# EAGLE board electro (EAGLE 7.2.0)
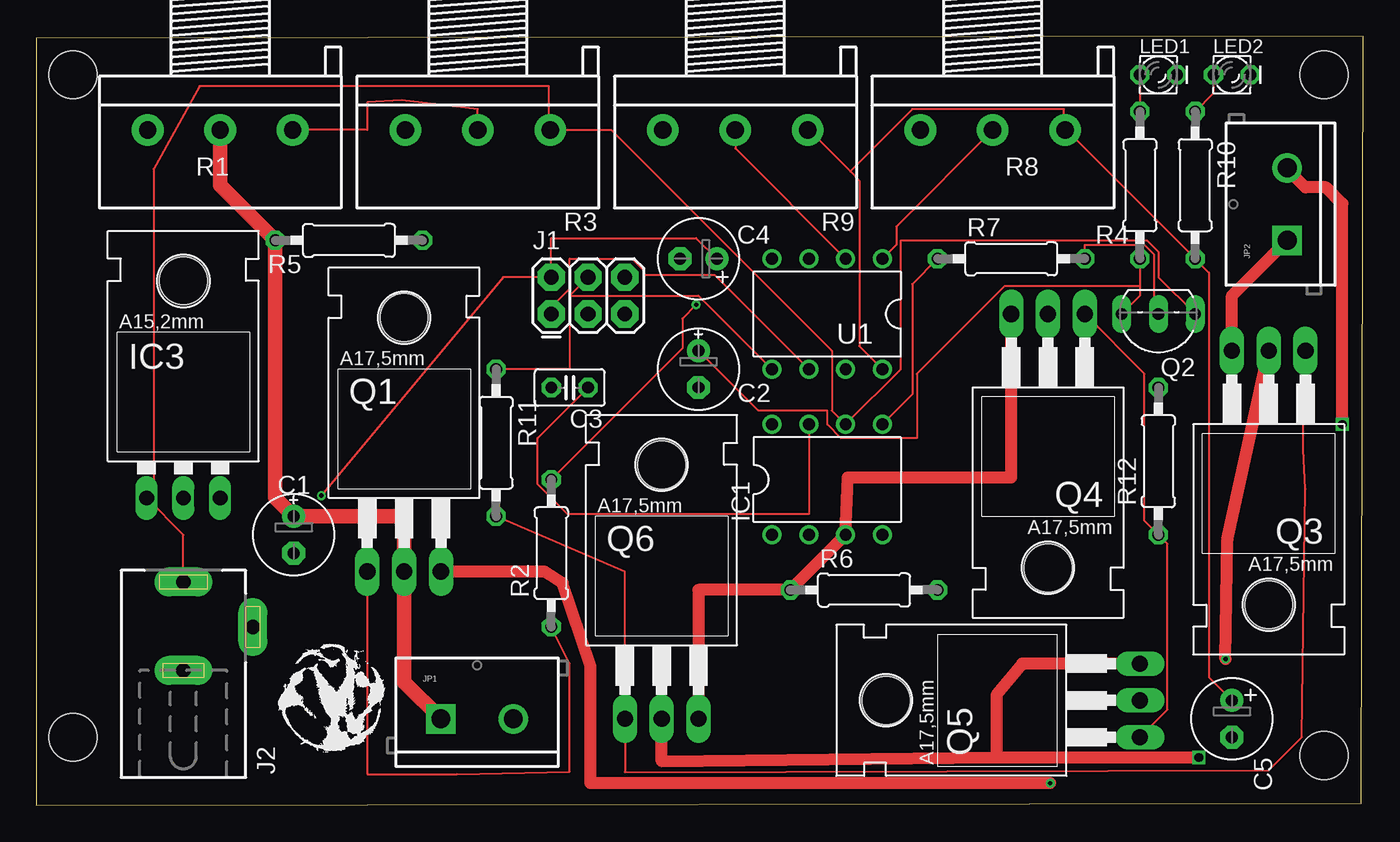
[diagram p0: board, top side]
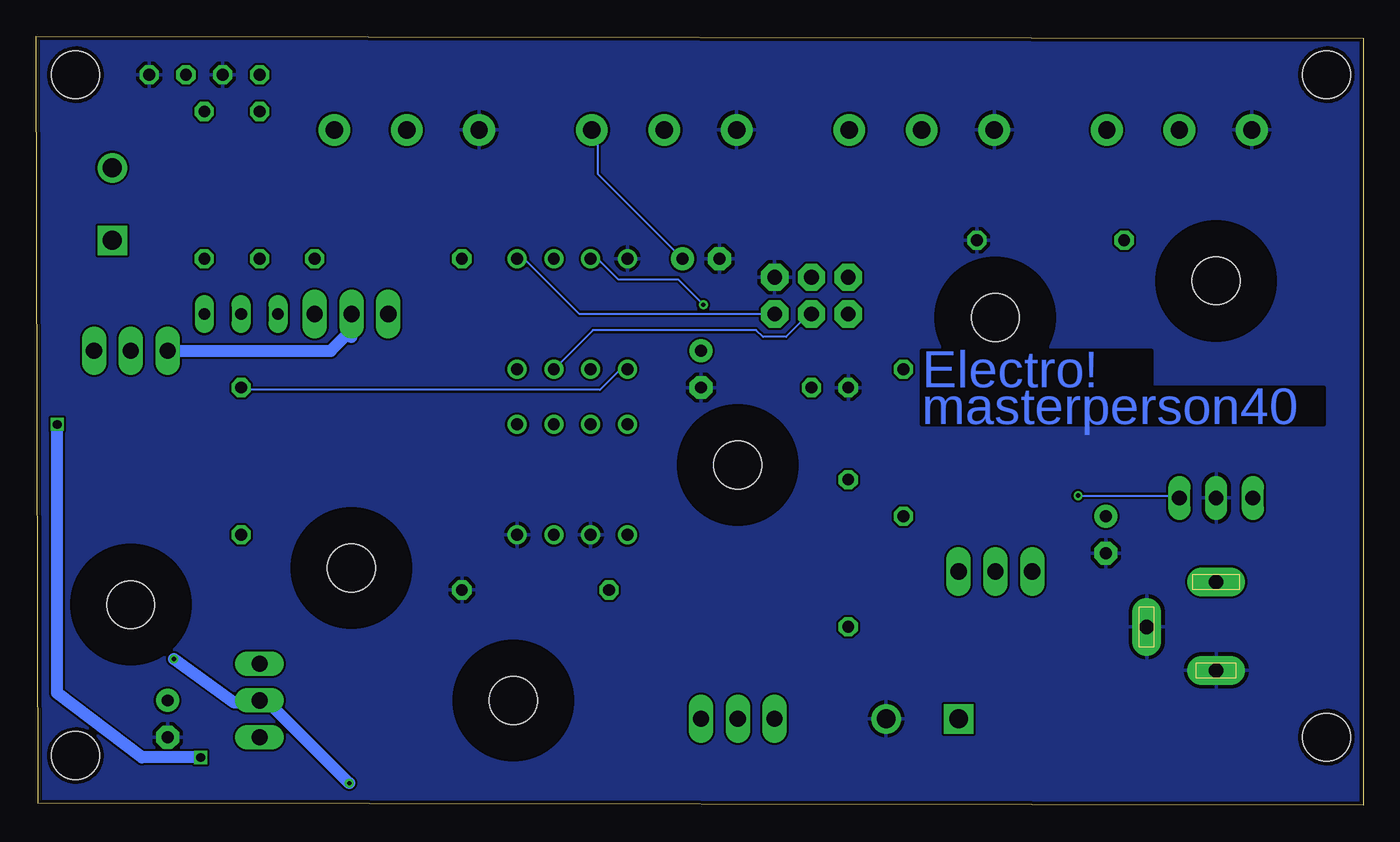
[diagram p1: board, bottom side, seen from below]

Size 91.62 x 53.08 mm. Coordinates in mm from the lower left corner, seen from the top.
Outline: 0,0 91.49,0.13 91.62,53.08 0,52.95 0,0
Copper layers (1*16): Top 0.035mm / dielectric 1.5mm / Bottom 0.035mm
Design rules "SeeedStudio_2layer_DRU_no_angle_20140221": minimum track width 6mil, minimum drill 12mil, track to track 6mil, track to pad 6mil, pad to pad 6mil, via to via 6mil, smd to smd 0mil, copper to edge 10mil, drill to drill 10mil, minimum pad ring 10mil, minimum via ring 6mil, stop-mask expansion 2mil, vias tented up to drill 100mil, thermal gap 10mil

## Footprints (pad centres in the part's own frame; a part is rotated, then mirrored left to right if it is on the bottom)
E2,5-6E = drill 0.813 pad 1.575: + -1.27,0 | drill 0.813 pad 1.575 octagon: - 1.27,0
C025-025X050 = drill 0.813 octagon: 1 -1.27,0; 2 1.27,0
E2,5-6 = drill 0.813 pad 1.6: + -1.27,0 | drill 0.813 pad 1.6 octagon: - 1.27,0
DIL08 = drill 0.813 pad 1.27: 1 -3.81,-3.81; 2 -1.27,-3.81; 3 1.27,-3.81; 4 3.81,-3.81; 5 3.81,3.81; 6 1.27,3.81; 7 -1.27,3.81; 8 -3.81,3.81
78XXL = drill 1.016 long: GND 0,-3.81; IN -2.54,-3.81; OUT 2.54,-3.81 | hole 3.302: 0,11.176
2X3 = drill 1.016 pad 1.88 octagon: 1 0,0; 2 0,2.54; 3 2.54,0; 4 2.54,2.54; 5 5.08,0; 6 5.08,2.54
DCJ0303 = drill 1 pad 2 long: 1 0,3.1; 2 4.8,0; 3 0,-3
SCREWTERMINAL-5MM-2 = drill 1.3 pad 2.032 square: 1 0,0 | drill 1.3 pad 2.032: 2 5,0
LED_LD260 = drill 0.813 octagon: A -1.27,0; K 1.27,0
TO220 = drill 1.118 long: 1 -2.54,-6.35; 2 0,-6.35; 3 2.54,-6.35 | hole 3.302: 0,11.176
TO92-EBC = drill 0.813 long: B 0,-1.27; C -2.54,-1.27; E 2.54,-1.27
3RP/1610N = drill 1.2 pad 2.184: 1 -5,0; 2 0,0; 3 5,0
0207/10 = drill 0.813 octagon: 1 -5.08,0; 2 5.08,0
STAND-OFF = hole 3.302: 0,0
PDIP08_300MIL = drill 0.813: 1 -3.81,-3.81; 2 -1.27,-3.81; 3 1.27,-3.81; 4 3.81,-3.81; 5 3.81,3.81; 6 1.27,3.81; 7 -1.27,3.81; 8 -3.81,3.81

## Placement (x,y rotation side)
C1  10uf  [E2,5-6E]  17.78,18.67 270 top
C2  10uF  [E2,5-6E]  45.72,30.1 270 top
C3  .1uf  [C025-025X050]  36.83,28.83 180 top
C4  47uF  [E2,5-6]  45.72,37.72 180 top
C5  47uF  [E2,5-6]  82.55,5.97 270 top
IC1  LM386N-1  [DIL08]  54.61,22.48 0 top
IC3  [78XXL]  10.16,25.02 0 top
J1  AVR_SPI_PRG_6PTH  [2X3]  35.56,33.91 0 top
J2  [DCJ0303]  10.16,12.32 0 top
JP1  M025MM  [SCREWTERMINAL-5MM-2]  27.94,5.97 0 top
JP2  M025MM  [SCREWTERMINAL-5MM-2]  86.36,38.99 90 top
LED1  [LED_LD260]  77.47,50.42 0 top
LED2  [LED_LD260]  82.55,50.42 0 top
Q1  TIP31C  [TO220]  25.4,22.48 0 top
Q2  BC548  [TO92-EBC]  77.47,32.64 180 top
Q3  TIP31C  [TO220]  85.09,25.02 180 top
Q4  TIP31C  [TO220]  69.85,27.56 180 top
Q5  TIP31C  [TO220]  69.85,7.24 90 top
Q6  TIP31C  [TO220]  43.18,12.32 0 top
R1  50k  [3RP/1610N]  12.7,46.61 180 top
R2  1.5k  [0207/10]  35.56,17.4 90 top
R3  1k  [3RP/1610N]  30.48,46.61 180 top
R4  1k  [0207/10]  76.2,42.8 90 top
R5  510  [0207/10]  21.59,38.99 0 top
R6  10k  [0207/10]  57.15,14.86 0 top
R7  390  [0207/10]  67.31,37.72 0 top
R8  50k  [3RP/1610N]  66.04,46.61 180 top
R9  50k  [3RP/1610N]  48.26,46.61 180 top
R10  1k  [0207/10]  80.01,42.8 270 top
R11  1.5k  [0207/10]  31.75,25.02 270 top
R12  1.5k  [0207/10]  77.47,23.75 90 top
STANDOFF1  STAND-OFF  [STAND-OFF]  88.9,3.43 0 top
STANDOFF2  STAND-OFF  [STAND-OFF]  2.54,4.7 0 top
STANDOFF3  STAND-OFF  [STAND-OFF]  2.54,50.42 0 top
STANDOFF4  STAND-OFF  [STAND-OFF]  88.9,50.42 0 top
U1  ATTINY85-20P  [PDIP08_300MIL]  54.61,33.91 180 top

## Library data of the parts
C1-C5 = rcl
IC1 = linear
IC3 = v-reg
J1 JP1 JP2 = SparkFun-Connectors
J2 = con-jack; OC_FARNELL: unknown; OC_NEWARK: unknown
LED1 LED2 = eagle-ltspice; SPICEMODEL: NONE; SPICEPREFIX: D; SPICETYPE: diode
Q1-Q6 = transistor-npn
R1 R3 R8 R9 = pot
R2 R4-R7 R10-R12 = eagle-ltspice; SPICEMODEL: NONE; SPICEPREFIX: R
STANDOFF1-STANDOFF4 = SparkFun-Electromechanical
U1 = _hhn_attiny25_45_85

## Nets
GND: C1.- C2.- C3.2 C4.- C5.- IC1.2 IC1.4 IC3.GND J1.6 J2.2 J2.3 JP1.2 LED1.K LED2.K R1.3 R3.3 R5.2 R6.2 R8.3 R9.3 U1.4
N$1: R1.1 R3.2
N$3: R9.2 U1.2
N$4: C2.+ Q2.E R4.1
N$5: R2.2 U1.3
N$6: Q1.1 R2.1
N$7: J1.5 R8.2 U1.1
N$8: C1.+ JP1.1 Q1.2 R1.2 R5.1
N$9: Q3.1 Q6.1 R11.2
N$10: J1.1 U1.6
N$11: JP2.1 Q3.3 Q4.2
N$12: IC1.5 R7.1
N$13: JP2.2 Q5.3 Q6.2
N$14: C3.1 IC1.7
N$15: Q2.B R7.2
N$16: J1.3 U1.7
N$17: Q4.1 Q5.1 R12.1
N$18: IC1.6 IC3.IN J2.1 Q2.C R3.1
N$19: Q1.3 Q3.2 Q5.2
N$20: J1.4 R11.1 R12.2 U1.5
N$21: LED1.A R4.2
N$24: LED2.A R10.1
N$26: IC1.3 Q4.3 Q6.3 R6.1
VCC: C4.+ C5.+ IC3.OUT J1.2 R8.1 R9.1 R10.2 U1.8

## Tracks (layer width: path | path; a pad name or v marks a point on that pad's centre or on a via)
GND
  pour Bottom: 0,52.96 91.44,52.96 91.31,0.38 -0.13,0.38
N$1
  Top 0.152: R1.1 22.86,46.61 22.86,48.51 25.24,48.67 30.48,48.04 R3.2
N$3
  Top 0.152: U1.2 48.26,45.34 R9.2
N$4
  Top 0.152: Q2.E 76.2,35.18 76.2,35.81 | R4.1 76.2,35.81 | C2.+ 49.85,27.24 54.61,27.24 54.61,26.29 55.56,25.34 60.8,25.34 60.8,29.78 66.83,35.81 76.2,35.81
N$5  (via drill 0.3)
  Top 0.152: R2.2 44.61,31.53 44.61,33.59 v45.56,34.54
  Bottom 0.152: v45.56,34.54 47.31,36.29 51.44,36.29 52.86,37.72 U1.3
N$6
  Top 0.152: R2.1 36.83,9.78 36.83,2.32 29.05,2.16 22.86,2.16 Q1.1
N$7
  Top 0.152: U1.1 59.37,38.67 59.37,39.94 R8.2
  Bottom 0.152: J1.5 54.13,33.91 57.94,37.72 U1.1
N$8
  Top 1.016: R1.2 12.7,42.8 R5.1 16.51,21.21 C1.+ 25.4,19.94 Q1.2 25.4,8.51 JP1.1
N$9
  Top 0.152: R11.2 40.64,16.13 Q6.1 40.64,2.29 85.09,2.41 87.38,4.7 87.63,21.84 87.47,24.54 87.47,31.21 Q3.1
N$10
  Top 0.152: U1.6 46.83,36.61 41.91,36.61 41.91,36.92 41.12,37.72 36.83,37.72 36.83,35.66 35.56,34.38 J1.1
N$11
  Top 0.813: JP2.1 82.55,35.18 Q3.3
  Bottom 0.152: 70.33,32.32 69.85,32.32
  Bottom 0.813: 69.85,32.32 Q4.2 | 70.33,32.32 71.28,31.37 Q3.3
N$12
  Top 0.152: IC1.5 60.48,28.35 60.48,35.97 R7.1
N$13  (via drill 0.6)
  Top 0.152: 86.36,43.91 JP2.2
  Top 0.813: Q6.2 43.18,3.05 66.29,3.3 | Q5.3 68.07,9.78 66.29,7.62 66.29,3.3 | 86.36,43.91 87.63,42.64 89.06,42.64 90.17,41.53 v90.17,26.29 | 66.29,3.3 v80.26,3.3
  Bottom 0.813: v80.26,3.3 84.33,3.3 90.17,7.75 v90.17,26.29
N$14
  Top 0.152: C3.1 34.61,25.34 34.61,22.16 36.67,20.1 53.34,20.1 IC1.7
N$15
  Top 0.152: Q2.B 77.15,34.23 77.15,38.04 76.52,38.67 72.39,38.67 R7.2
N$16
  Bottom 0.152: U1.7 53.18,32.8 41.91,32.8 41.43,32.32 39.85,32.32 38.26,33.91 J1.3
N$17
  Top 0.152: Q5.1 78.11,6.6 78.11,18.03 R12.1 76.52,19.62 76.52,29.78 Q4.1
N$18
  Top 0.152: J2.1 10.16,18.67 IC3.IN 8.1,21.68 8.1,43.91 11.27,49.62 35.4,49.62 35.4,46.61 R3.1 39.69,46.61 54.93,31.37 54.93,27.24 IC1.6 59.69,30.1 59.69,38.99 76.68,38.99 77.47,38.2 77.47,36.45 Q2.C
N$19  (via drill 0.3)
  Top 0.813: Q1.3 35.08,16.13 36.35,15.34 38.26,9.62 38.26,1.52 v70.01,1.52 | Q3.2 82.23,18.35 v82.11,10.1
  Bottom 0.152: 75.72,7.24 75.56,7.08 Q5.2 75.72,7.24
  Bottom 0.813: v70.01,1.52 75.56,7.08 77.95,7.08 v82.11,10.1
N$20
  Top 0.152: R11.1 36.83,30.1 36.83,35.18 | J1.4 36.83,35.18 | U1.5 45.72,35.18 36.83,35.18
  Bottom 0.152: R12.2 77.31,28.67 52.7,28.67 51.28,30.1 U1.5
N$21
  Top 0.152: LED1.A R4.2
N$24
  Top 0.152: R10.1 81.28,49.15 LED2.A
N$26
  Top 0.813: Q6.3 45.72,14.86 R6.1 IC1.3 56.04,22.64 67.31,22.64 Q4.3
VCC  (via drill 0.3)
  Top 0.152: v19.69,21.37 32.23,36.45 J1.2 35.56,39.15 45.56,39.15 C4.+ | U1.8 56.83,31.69 56.83,43.12 56.2,43.75 | 56.2,43.75 53.34,46.61 R9.1 | C5.+ 80.96,8.83 80.96,36.77 R10.2 71.12,46.61 R8.1 70.96,46.61 70.96,48.04 60.48,48.04 56.2,43.75
  Bottom 0.152: IC3.OUT 12.86,21.37 v19.69,21.37 | C4.+ 52.86,43.59 52.86,46.61 R9.1

## Text on the board
Bottom: Electro! | masterperson40